# Altium PCB ETS_v8-nordic-split.PcbDoc
Units mil, origin at the board's own origin, x right, y up, seen from the top; angles counter-clockwise.
Board outline 1165.35 x 326.77 mil, 2 copper layers (Top Layer, Bottom Layer), stack 62.8 mil thick; 35 components, 30 nets, 135 pads, 13 vias.
Unrouted connection lines stored in the file: 27.
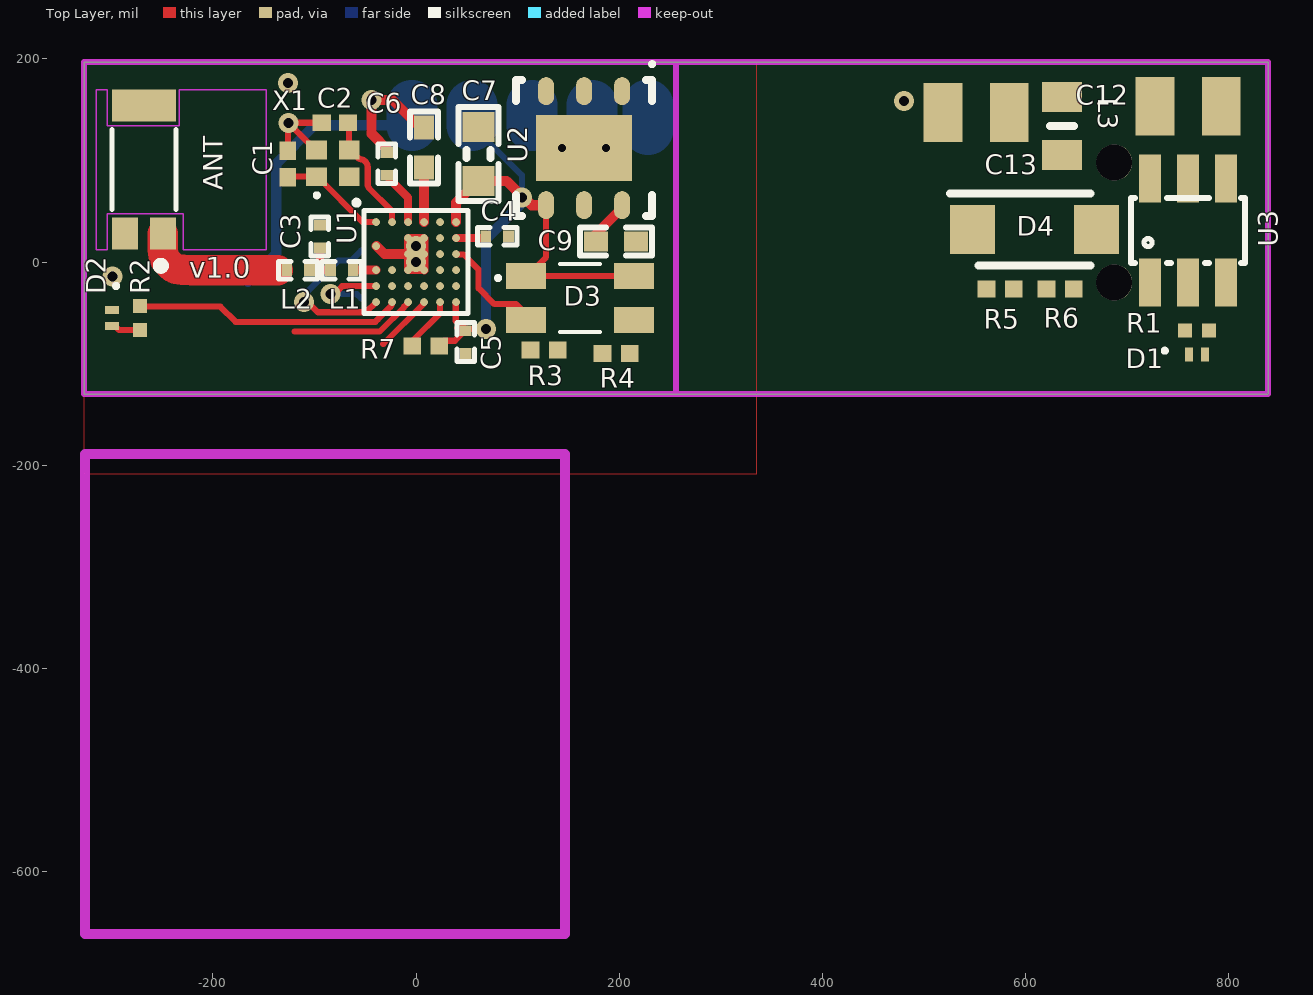
[diagram p0: Top Layer view]
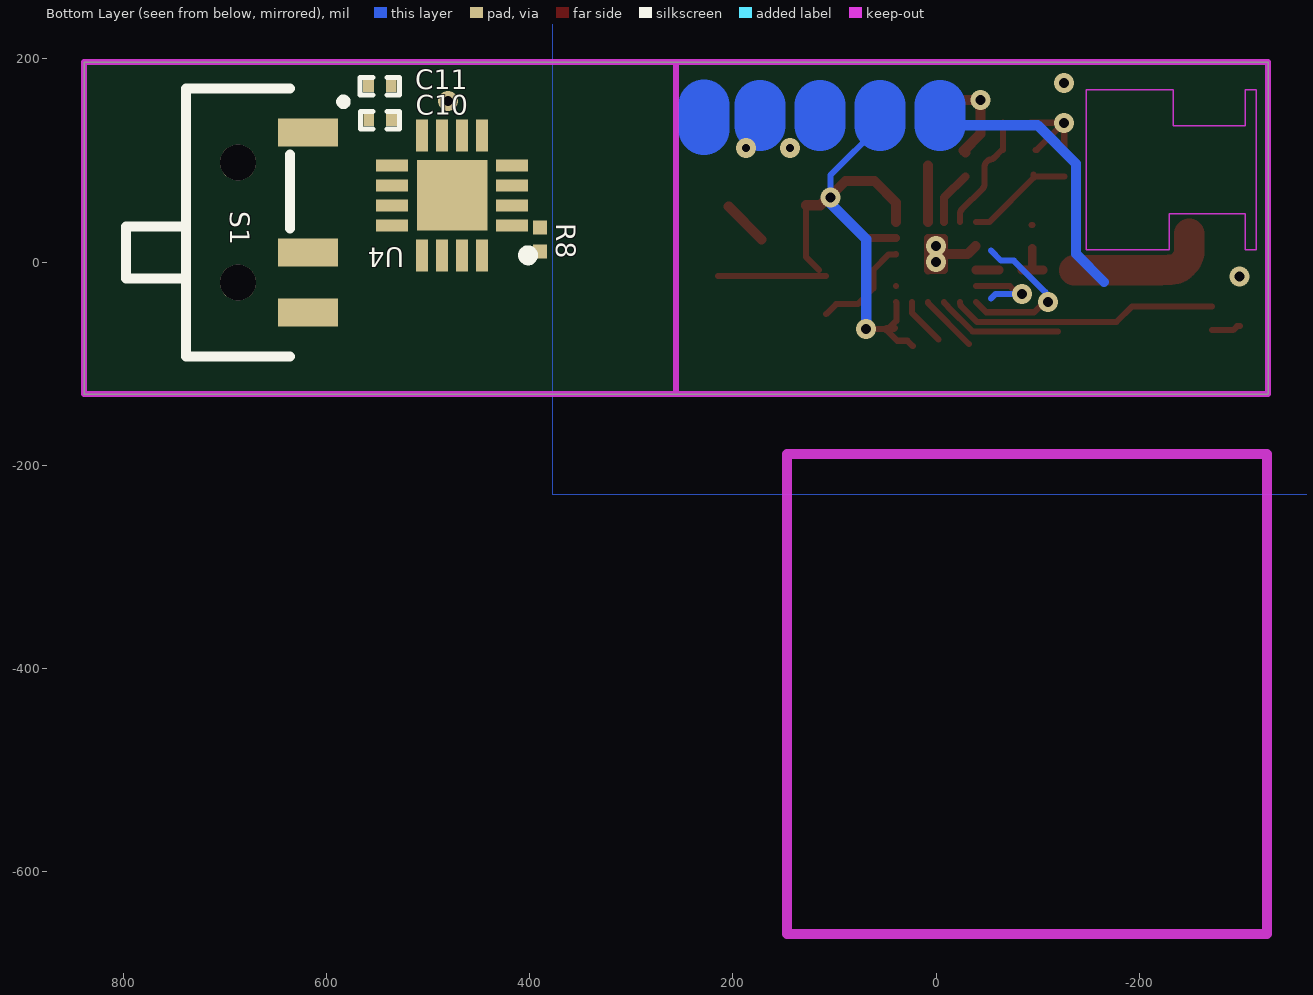
[diagram p1: Bottom Layer view, seen from below]

## Layer stack, top to bottom
Top Solder: solder mask 0.4, Solder Resist, Dk 3.5
Top Layer: signal copper 1.4
Dielectric1: core 60, FR-4, Dk 4.8
Bottom Layer: signal copper 1.4
Bottom Solder: solder mask 0.4, Solder Resist, Dk 3.5

## Board outline
-326.77,-129.92 838.58,-129.92 838.58,196.85 -326.77,196.85

## Design rules (kind name [scope] priority, off if disabled: settings)
Clearance Polygon_ANT [(InNamedPolygon('Top_Layer-GND')) or (InNamedPolygon('Bottom_Layer-GND')) vs InNet('RF')] p1: gap=5 ignorepadtopadclearanceinfootprint=FALSE except(0: Arc-Hole Track-Hole SMDPad-Hole THPad-Hole Via-Hole Fill-Hole Poly-Hole Region-Hole Text-Hole)
Clearance Polygon [(InNamedPolygon('Top_Layer-GND')) or (InNamedPolygon('Bottom_Layer-GND')) or (InNamedPolygon('Mid_Layer_1-GND')) or (InNamedPolygon('Mid_Layer_2-GND'))] p2: gap=8 ignorepadtopadclearanceinfootprint=FALSE except(0: Arc-Hole Track-Hole SMDPad-Hole THPad-Hole Via-Hole Fill-Hole Poly-Hole Region-Hole Text-Hole)
Clearance [All] p3: gap=5 ignorepadtopadclearanceinfootprint=FALSE except(3.5: Arc-Arc Arc-Track Track-Track)
ComponentClearance [All] p1 off: gap=10 collisioncheckmode=3 verticalgap=10 showdistances=FALSE
FabricationTestPointUsage TestPointUsage [All] p1: valid=0 allowmultiple=FALSE
FabricationTestpoint Testpoint [All] p1: side=3 testpointundercomponent=TRUE minsize=40 maxsize=100 preferedsize=60 minholesize=0 maxholesize=40 preferedholesize=32 testpointgrid=1 allowsidetop=TRUE allowsidebottom=TRUE usegrid=TRUE gridtolerance=0.01
Height [All] p1 off: minheight=0 maxheight=1000 prefheight=500
HoleSize [All] p1: absolutevalues=TRUE maxlimit=248.03 minlimit=7.87 maxpercent=80.000 minpercent=20.000
HoleToHoleClearance [All] p1 off: gap=3 allowstackedmicrovias=FALSE
MinimumAnnularRing [All] p1 off: minimumring=3
PolygonConnect PolygonConnect_1 [isVia and innet(gnd)] p1: connectstyle=Direct reliefconductorwidth=10 reliefentries=4 polygonreliefangle="90 Angle" airgapwidth=10
PolygonConnect [All] p2: connectstyle=Relief reliefconductorwidth=10 reliefentries=4 polygonreliefangle="90 Angle" airgapwidth=10
RoomDefinition ETS_v8-nordic-split [InComponentClass('ETS_v8-nordic-split')] p1: confinementstyle=ConfineIn formatcopy=TRUE lockcomponents=FALSE outline -413.39,-251.97 874.02,-251.97 874.02,256.85 -413.39,256.85
RoutingVias [All] p1: holewidth=16 width=32 viastyle="Through Hole" minholewidth=3.94 minwidth=9.84 maxholewidth=28 maxwidth=50
SilkToSolderMaskClearance SilkscreenOverComponentPads [IsPad] p1: minsilkscreentomaskgap=10 clearancetoexposedcopper=TRUE
SolderMaskExpansion [All] p1: expansion=3 istentingtop=FALSE
Width [All] p1: maxlimit=100 minlimit=5 preferedwidth=6 minimp=50.000000 maximp=50.000000 favimp=50.000000
23 further rules are at their usual default settings.

## Components (designator, comment, footprint, x,y, rotation, side; value= is the part's Value field where it differs from the comment)
ANT "W3008" *ANTENNA_W3008W3008(Primary) -267.72,91.05 r270 top
C1 "16pF" CAPC0603X33N -126.28,96.46 r270 top
C2 "16pF" CAPC0603X33N -80.02,137.18 r0 top
C3 "1.2pF" CAPC0603X03L_C -94.63,25.12 r270 top
C4 "100nF" CAPC0603X03L_C 79.87,25.25 r0 top
C5 "100nF" CAPC0603X03L_C 48.7,-78.74 r270 top
C6 "100pF" CAPC0603X03L_C -28.81,96.77 r270 top
C7 "4.7µF" CAPC1608X06L 61.6,106.3 r90 top
C8 "1.0µF" CAPC1005X04L 7.87,112.95 r270 top
C9 "1.0µF" CAPC1005X04L 196.85,20.2 r180 top
C10 "100nF" CAPC0603X03L_C 547.24,139.76 r0 bottom
C11 "100nF" CAPC0603X03L_C 547.52,173.23 r180 bottom
C12 "22uF" CAPC2012X145N 759.84,153.43 r0 top
C13 "22uF" CAPC2012X145N 551.18,147.18 r0 top
D1 "APG0603VGC-TT-5MAV" LED_APG0603SEC-E-TT 768.46,-91.17 r0 top
D2 "APG0603SURC-TT" LED_APG0603SEC-E-TT -299.21,-55.12 r270 top
D3 "GP2S60A" GP2S60B 161.42,-35.43 r0 top
D4 "SS34FA" SODFL3618X143N 608.55,32.14 r0 top
L1 "2.2nH" INDC0603X03L_C -73.13,-7.87 r180 top
L2 "3.3nH" INDC0603X03L_C -116.13,-7.88 r180 top
L3 "LQM18PH4R7MFRL" LQW18CA32NJ00D 635.96,133.86 r270 top
R1 "60R 1% 0201(0603)" RESC0201(0603)_L 768.46,-67.55 r0 top value="1.00 Ohm"
R2 "137R 1% 0201(0603)" RESC0201(0603)_L -271.65,-55.12 r270 top value="1.00 Ohm"
R3 "210R 1% 0201(0603)" RESC0603X26N 125.98,-86.61 r180 top
R4 "324R 1% 0201(0603)" RESC0603X26N 196.85,-89.96 r0 top
R5 "10kR" RESC0603X26N 574.8,-26.61 r180 top
R6 "4.7kR" RESC0603X26N 633.86,-26.61 r180 top
R7 "1kR" RESC0603X26N 9.57,-82.68 r0 top
R8 "120mR 1% 0201(0603)" RESC0201(0603)_L 389.76,22.27 r270 bottom value="1.00 Ohm"
S1 "SSSS810701" SSSS810701 618.25,9.36 r270 bottom
U1 "nRF52811-CAAA" BGA33C40P6X6_247X246X50 0,0 r0 top
U2 "LD39050PU33R" DFN6D_L 165.35,112.11 r270 top
U3 "" *SOT23-6 759.84,31 r0 top
U4 "DRV8847RTER" QFN50P300X300X80-17N-D 476.38,65.74 r0 bottom
X1 "ECS-320-10-48-CKY-TR" ECS240848CKYTR -81.99,97.23 r0 top

## Footprints (in the part's own frame and the unit in brackets; to place one, negate y for a bottom-side part, rotate by r counter-clockwise, add the part's x,y. Pads: shape width x height; smd on the part's side, far side on the other; paste and mask are expansions set on the pad)
*ANTENNA_W3008W3008(Primary) [mm]
  rect 0.8x0.65 smd: FEED(1.6,0.475) G1(1.6,-0.475)
  rect 0.8x1.6 smd: G2(-1.6,0)
  Keep-Out Layer region: -2,-1.2 -2,-0.925 -1.1,-0.925 -1.1,0.875 -2,0.875 -2,3.05 2,3.05 2,0.975 1.1,0.975 1.1,-0.925 2,-0.925 2,-1.2
  Keep-Out Layer region: -2,-1.2 2,-1.2 2,-0.925 1.1,-0.925 1.1,0.975 2,0.975 2,3.05 -2,3.05 -2,0.875 -1.1,0.875 -1.1,-0.925 -2,-0.925
  Keep-Out Layer region: -2,-1.2 -2,-0.925 -1.1,-0.925 -1.1,0.875 -2,0.875 -2,3.05 2,3.05 2,0.975 1.1,0.975 1.1,-0.925 2,-0.925 2,-1.2
  Keep-Out Layer region: -2,-1.2 2,-1.2 2,-0.925 1.1,-0.925 1.1,0.975 2,0.975 2,3.05 -2,3.05 -2,0.875 -1.1,0.875 -1.1,-0.925 -2,-0.925
  Keep-Out Layer region: -2,-1.2 -2,-0.925 -1.1,-0.925 -1.1,0.875 -2,0.875 -2,3.05 2,3.05 2,0.975 1.1,0.975 1.1,-0.925 2,-0.925 2,-1.2
  Keep-Out Layer region: -2,-1.2 2,-1.2 2,-0.925 1.1,-0.925 1.1,0.975 2,0.975 2,3.05 -2,3.05 -2,0.875 -1.1,0.875 -1.1,-0.925 -2,-0.925
  silkscreen extent -1,-0.8 2.5,0.8
*SOT23-6 [mm]
  rect 0.55x1.2 smd: 1(-0.95,-1.3) 2(0,-1.3) 3(0.95,-1.3) 4(0.95,1.3) 5(0,1.3) 6(-0.95,1.3)
  silkscreen extent -1.42,-0.81 1.42,0.81, body extent -1.45,-1.4 1.45,1.4, height 1.45
BGA33C40P6X6_247X246X50 [mm] "BGA, 33-Leads, Body 2.47x2.46mmx0.50mm, Pitch 0.40mm"
  round 0.194 smd mask+0.05: A1(-1,1) A2(-0.6,1) A3(-0.2,1) A4(0.2,1) A5(0.6,1) A6(1,1) B3(-0.2,0.6) B4(0.2,0.6) B5(0.6,0.6) B6(1,0.6) C1(-1,0.4) D3(-0.2,0.2) D4(0.2,0.2) D5(0.6,0.2) D6(1,0.2) E1(-1,-0.2) E2(-0.6,-0.2) E3(-0.2,-0.2) E4(0.2,-0.2) E5(0.6,-0.2) E6(1,-0.2) F1(-1,-0.6) F2(-0.6,-0.6) F3(-0.2,-0.6) F4(0.2,-0.6) F5(0.6,-0.6) F6(1,-0.6) G1(-1,-1) G2(-0.6,-1) G3(-0.2,-1) G4(0.2,-1) G5(0.6,-1) G6(1,-1)
  silkscreen extent -1.55,-1.29 1.3,1.55, body extent -1.23,-1.23 1.23,1.23, height 0.5
CAPC0603X03L_C [mm] "Chip Capacitor, 2-Leads, Body 0.6x0.3mm, IPC High Density"
  rect 0.27x0.3 smd: 1(-0.285,0) 2(0.285,0)
  silkscreen extent -0.49,-0.22 0.49,0.22, body extent -0.3,-0.15 0.31,0.15, height 0.3
CAPC0603X33N [mm]
  rect 0.46x0.42 smd: 1(-0.33,0) 2(0.33,0)
  body extent -0.3,-0.15 0.3,0.15, height 0.33
CAPC1005X04L [mm] "Chip Capacitor, 2-Leads, Body 1.0x0.5mm, IPC High Density"
  rect 0.6x0.5 smd: 1(-0.5,0) 2(0.5,0)
  silkscreen extent -0.9,-0.35 0.9,0.35, body extent -0.51,-0.25 0.51,0.25, height 0.5
CAPC1608X06L [mm] "Chip Capacitor, 2-Leads, Body 1.6x0.8mm, IPC High Density"
  rect 0.75x0.8 smd: 1(-0.675,0) 2(0.675,0)
  silkscreen extent -1.17,-0.5 1.17,0.5, body extent -0.8,-0.43 0.8,0.43, height 0.8
CAPC2012X145N [mm]
  rect 0.97x1.47 smd: 1(-0.83,0) 2(0.83,0)
  body extent -1,-0.63 1,0.63, height 1.45
DFN6D_L [mm] "SON, 6-Leads, Body 3x3mm, Pitch 0.95mm, Thermal Pad 2.4x1.65mm, IPC High Density"
  oval 0.7x0.4 smd: 1(-1.425,0.95) 2(-1.425,0) 3(-1.425,-0.95) 4(1.425,-0.95) 5(1.425,0) 6(1.425,0.95)
  rect 1.65x2.4 smd: 7(0,0)
  silkscreen extent -2.15,-1.7 1.7,1.75, body extent -1.55,-1.55 1.55,1.55, height 0.95
ECS240848CKYTR [mm]
  rect 0.52x0.47 smd: 1(-0.41,-0.335) 2(0.41,-0.335) 3(0.41,0.335) 4(-0.41,0.335)
  silkscreen extent -0.45,-0.85 -0.35,-0.75
GP2S60B [mm]
  rect 1x0.65 smd: 1(-1.35,0.55) 2(-1.35,-0.55) 3(1.35,-0.55) 4(1.35,0.55)
  silkscreen extent -2.1,-0.85 0.5,0.85, body extent -1.35,-0.85 1.35,0.85, height 1.35
INDC0603X03L_C [mm] "Chip Inductor, 2-Leads, Body 0.6x0.3mm, IPC High Density"
  rect 0.27x0.3 smd: 1(-0.285,0) 2(0.285,0)
  silkscreen extent -0.49,-0.22 0.49,0.22, body extent -0.31,-0.16 0.31,0.16, height 0.26
LED_APG0603SEC-E-TT [mm]
  rect 0.2x0.35 smd paste-1: A(0.2,0) C(-0.2,0)
  silkscreen extent -0.85,0.05 -0.75,0.15
LQW18CA32NJ00D [mm]
  rect 0.75x1 smd: 1(-0.725,0) 2(0.725,0)
  silkscreen extent 0,-0.3 0,0.3
QFN50P300X300X80-17N-D [mm]
  rect 0.8x0.3 smd: 1(-1.5,0.75) 2(-1.5,0.25) 3(-1.5,-0.25) 4(-1.5,-0.75) 9(1.5,-0.75) 10(1.5,-0.25) 11(1.5,0.25) 12(1.5,0.75)
  rect 0.3x0.8 smd: 5(-0.75,-1.5) 6(-0.25,-1.5) 7(0.25,-1.5) 8(0.75,-1.5) 13(0.75,1.5) 14(0.25,1.5) 15(-0.25,1.5) 16(-0.75,1.5)
  rect 1.76x1.76 smd: 17(0,0)
  silkscreen extent -2.02,1.38 -1.77,1.62, body extent -1.55,-1.55 1.55,1.55, height 0.8
RESC0201(0603)_L [mm] "Chip Resistor, Body 0.6x0.3mm, IPC High Density"
  rect 0.35x0.35 smd: 1(-0.3,0) 2(0.3,0)
  body extent -0.31,-0.16 0.31,0.16, height 0.3
RESC0603X26N [mm]
  rect 0.44x0.42 smd: 1(-0.34,0) 2(0.34,0)
  body extent -0.3,-0.15 0.3,0.15, height 0.26
SODFL3618X143N [mm]
  rect 1.12x1.22 smd: 1(-1.55,0) 2(1.55,0)
  silkscreen extent -2.11,-0.9 1.4,0.9, body extent -1.8,-0.9 1.8,0.9, height 1.43
SSSS810701 [mm]
  rect 0.7x1.5 smd: 1(-3,0) 2(0,0) 3(1.5,0)
  round 0.9 hole 0.9 unplated: 4(-2.25,-1.75) 5(0.75,-1.75)
  silkscreen extent -4.1,-4.55 2.6,0.94

## Part data
ANT: "2.4GHz Bluetooth Chip RF Antenna 2.4GHz ~ 2.483GHz 1.7dBi Solder Surface Mount", Package=None, Availability=Unavailable, MF="PulseLarsen Antennas", MP=W3008, Price=None, SnapEDA_Link=https://www.snapeda.com/parts/W3008/PulseLarsen%20Antennas/view-part/233875/?ref=snap
C1 C2: library part GRM0335C1H160JA01D, "Capacitor", Manufacturer_Name="Murata Electronics", Datasheet Link=http://www.murata.com/~/media/webrenewal/support/library/catalog/products/capacitor/mlcc/c02e.pdf, Height=0.33mm, Manufacturer_Part_Number=GRM0335C1H160JA01D
C3: library part C0201-1.2p, "Capacitor, NP0, ±5%", Footprint Doc=0201, LatestRevisionDate=2014-11-13, Part Number=C0201-1.2p, Pin Count=2, Published=2014-11-13, Publisher="Nordic Semiconductor"
C4 C5: library part C0201-100n, "Capacitor, X5R, ±10%", Footprint Doc=0201, LatestRevisionDate=2017-11-09, Part Number=C0201-100n, Pin Count=2, Published=2014-11-13, Publisher="Nordic Semiconductor"
C6: library part C0201-100p, "Capacitor, NP0, ±2%", Footprint Doc=0201, LatestRevisionDate=2017-11-09, Part Number=C0201-100p, Pin Count=2, Published=2014-11-13, Publisher="Nordic Semiconductor"
C7: library part C0603-4µ7, "Capacitor, X5R, ±10%", Footprint Doc=0603, LatestRevisionDate=2009-11-23, Part Number=C0603-4µ7, Pin Count=2, Published=2009-05-08, Publisher="Nordic Semiconductor"
C8 C9: library part C0402-1µ0, "Capacitor, X5R, ±5%", Footprint Doc=0402, LatestRevisionDate=2016-08-22, Part Number=C0402-1µ0, Pin Count=2, Published=2009-05-08, Publisher="Nordic Semiconductor"
C10: "Capacitor, X5R, ±10%", Part Number=C0201-100n, Footprint Doc=0201, LatestRevisionDate=2017-11-09, Pin Count=2, Published=2014-11-13, Publisher="Nordic Semiconductor"
C11: library part GRM188R61C106KAALD, "Capacitor", Manufacturer_Name="Murata Electronics", Datasheet Link=https://psearch.en.murata.com/capacitor/product/GRM188R61C106KAAL%23.html, Height=0.9mm, Manufacturer_Part_Number=GRM188R61C106KAALD
C12 C13: library part GRM21BR61E226ME44K, "Capacitor", Manufacturer_Name="Murata Electronics", Datasheet Link=http://www.murata.com/~/media/webrenewal/support/library/catalog/products/capacitor/mlcc/c02e.pdf, Height=1.45mm, Manufacturer_Part_Number=GRM21BR61E226ME44K
D1: library part APG0603SEC-E-TT, "Green 527nm LED Indication - Discrete 3V 2-SMD, 0201", Package="0201 Kingbright", Availability=Unavailable, MF=Kingbright, MP=APG0603SEC-E-TT, Price=None, SnapEDA_Link=https://www.snapeda.com/parts/APG0603SEC-E-TT/Kingbright/view-part/2754377/?ref=snap
D2: library part APG0603SEC-E-TT, "Red 631nm LED Indication - Discrete 1.92V 2-SMD, 0201", Package="0201 Kingbright", Availability=Unavailable, MF=Kingbright, MP=APG0603SEC-E-TT, Price=None, SnapEDA_Link=https://www.snapeda.com/parts/APG0603SEC-E-TT/Kingbright/view-part/2754377/?ref=snap
D3: library part GP2S60B, "LED", Manufacturer_Name="Sharp Microelectronics", Mouser2 Part Number=852-GP2S60B, Datasheet Link=https://componentsearchengine.com/Datasheets/1/GP2S60B.pdf, Height=1.25mm, Manufacturer_Part_Number=GP2S60B, Mouser2 Price/Stock=https://www.mouser.com/Search/Refine.aspx?Keyword=852-GP2S60B
D4: "Schottky Diode", Manufacturer_Name="ON Semiconductor", Mouser2 Part Number=512-SS34FA, Datasheet Link=https://componentsearchengine.com/Datasheets/1/SS34FA.pdf, Height=1.43mm, Manufacturer_Part_Number=SS34FA, Mouser2 Price/Stock=https://www.mouser.com/Search/Refine.aspx?Keyword=512-SS34FA
L1: library part L0201-2n2, "High frequency chip inductor ±5%", Footprint Doc=0201, LatestRevisionDate=2013-04-10, Part Number=L0201-2n2, Pin Count=2, Published=2013-04-10, Publisher="Nordic Semiconductor"
L2: library part L0201-3n3, "High frequency chip inductor ±5%", Footprint Doc=0201, LatestRevisionDate=2013-04-10, Part Number=L0201-3n3, Pin Count=2, Published=2013-04-10, Publisher="Nordic Semiconductor"
L3: "Inductor", Manufacturer_Name="Murata Electronics", Mouser2 Part Number=81-LQM18PH4R7MFRL, Datasheet Link=https://psearch.en.murata.com/inductor/product/LQM18PH4R7MFR%23.html, Height=0.95mm, Manufacturer_Part_Number=LQM18PH4R7MFRL, Mouser2 Price/Stock=https://www.mouser.com/Search/Refine.aspx?Keyword=81-LQM18PH4R7MFRL
R1 R2 R8: library part CMP-1010-00171-1, "1R 0.05W 1% 0201 (0603 Metric)  SMD", Case-EIA=0201, Case-Metric=0603, Power="0.05 W", Tolerance="1 %", Technology=SMT
R3: library part RC0201FR-0710KL, "Resistor", Manufacturer_Name="YAGEO (PHYCOMP)", Mouser2 Part Number=603-RC0201FR-0710KL, Datasheet Link=https://componentsearchengine.com/Datasheets/1/RC0201FR-0710KL.pdf, Height=0.26mm, Manufacturer_Part_Number=RC0201FR-0710KL, Mouser2 Price/Stock=https://www.mouser.com/Search/Refine.aspx?Keyword=603-RC0201FR-0710KL
R4: library part RC0201FR-07390RL, "Resistor", Manufacturer_Name="YAGEO (PHYCOMP)", Datasheet Link=http://www.yageo.com/documents/recent/PYu-RC0201_51_RoHS_L_8.pdf, Height=0.26mm, Manufacturer_Part_Number=RC0201FR-07390RL
R5: library part RC0201FR-07100KL, "Resistor", Manufacturer_Name="YAGEO (PHYCOMP)", Datasheet Link=http://www.yageo.com/documents/recent/PYu-RC0201_51_RoHS_L_8.pdf, Height=0.26mm, Manufacturer_Part_Number=RC0201FR-07100KL
R6: library part CRCW02014K70FKED, "Resistor", Manufacturer_Name=Vishay, Datasheet Link=http://www.vishay.com/docs/20035/dcrcwe3.pdf, Height=0.28mm, Manufacturer_Part_Number=CRCW02014K70FKED
R7: library part CRCW02011K00FNED, "Resistor", Manufacturer_Name=Vishay, Datasheet Link=http://www.vishay.com/docs/20035/dcrcwe3.pdf, Height=0.28mm, Manufacturer_Part_Number=CRCW02011K00FNED
S1: "Switch", Manufacturer_Name=ALPS, Mouser2 Part Number=688-SSSS810701, Datasheet Link=https://componentsearchengine.com/Datasheets/1/SSSS810701.pdf, Manufacturer_Part_Number=SSSS810701, Mouser2 Price/Stock=https://www.mouser.com/Search/Refine.aspx?Keyword=688-SSSS810701
U1: library part nRF52811-CAAAA0, "Multi-protocol Bluetooth Low Energy, IEEE 802.15.4, ANT and 2.4GHz proprietary system-on-chip", Manufacturer="Nordic Semiconductor", Footprint Doc=WLCSP-33, LatestRevisionDate=2019-01-30, Manufacturer Part Number=nRF52811-CAAAA0, Part Number=nRF52811-CAAAA0, Pin Count=33, Published=2019-01-30, Publisher="Nordic Semiconductor"
U2: library part CMP-0244-00288-1, "500 mA Low Quiescent Current Low Noise Voltage Regulator, 3.3V, 6-Pin VDFDPN, Tape and Reel", ComponentLink1Description="Manufacturer URL", ComponentLink1URL=http://www.st.com, ComponentLink2Description=Datasheet, ComponentLink2URL=http://www.st.com/internet/com/TECHNICAL_RESOURCES/TECHNICAL_LITERATURE/DATASHEET/CD00227527.pdf, DatasheetVersion=1/03/2009, PackageDescription="6-Pin Plastic, Dual LLP, 3 x 3 mm Body, 0.95 mm Pitch, Exposed Pad", PackageReference=DFN6D, PackageVersion=2008
U3: library part MT3608, "High Efficiency 1.2MHz / 2A Step Up Converter", SnapEDA_Link=https://www.snapeda.com/parts/MT3608/Aerosemi%20Technology%20Co.%2C%20Ltd/view-part/3218014/?ref=snap
U4: "Integrated Circuit", Manufacturer_Name="Texas Instruments", Mouser2 Part Number=595-DRV8847RTER, Datasheet Link=http://www.ti.com/lit/gpn/DRV8847, Height=0.8mm, Manufacturer_Part_Number=DRV8847RTER, Mouser2 Price/Stock=https://www.mouser.com/Search/Refine.aspx?Keyword=595-DRV8847RTER
X1: "Crystal or Oscillator", Manufacturer_Name=ECS, Datasheet Link=https://www.ecsxtal.com/store/pdf/ECX-1048.pdf, Height=0mm, Manufacturer_Part_Number=ECS-320-10-48-CKY-TR

## Free pads (board coordinates)
  round 19.68 on Mech16: 1(0,15.75) 2(0,0)

## Via types
v1: diameter 19.68, hole 9.84, Top Layer to Bottom Layer, tented both sides, 11 vias
v2: diameter 19.68, hole 7.87, Top Layer to Bottom Layer, 2 vias

## Nets (pads, with @x,y where several pads share a name; then routed paths per layer and width w, separated by ;. In a path a pad name is that pad's centre, name@x,y a point inside that pad or via, vN(x,y) a via of type N, cw(c..) or ccw(c..) an arc to the next point about the centre after c; other vN are vias at no path point)
DEC1: C4.1 U1.B6 | length 29.3
  Top Layer w8: U1.B6 C4.1@68.65,23.62
DEC2: C6.2 U1.A3 | length 53.7
  Top Layer w8: C6.2@-28.81,84.37 -7.87,63.43 U1.A3
DEC4: C8.2 U1.A4 | length 55.4
  Top Layer w10: U1.A4 C8.2@7.87,94.81
GND: ANT.G1 ANT.G2 C1.1 C2.1 C3.1 C4.2 C5.2 C6.1 C7.2 C8.1 C9.1 C10.2 C11.1 C12.2 C13.2 D1.C D2.C R3.1 R4.1 R6.1 R8.2 U1.B3 U1.B4 U1.C1 U1.D3 U1.D4 U1.E3 U1.E4 U2.2 U2.7 U3.2 U4.7 U4.8 U4.11 U4.12 U4.17 X1.4 | length 363.6
  Top Layer w6: C1.1 -126.18,109.55 v1@-126.18,137.08 ; X1.4 -99.11,110.42 v1(-125.77,137.08) v1@-126.18,137.08 ; C3.1 C3.1@-94.04,36.34 ; C2.1 -126.08,137.18 v1@-126.18,137.08 ; U1.C1 U1.C1@-38.93,15.75
  Top Layer w8: U1.B3 U1.B4 ; U1.D3@-7.75,7.62 U1.D3@-7.75,7.87 ; U1.B3@-7.75,23.37 U1.D3@-7.75,7.87 ; U1.E4 U1.E3 U1.D3 U1.D3@-7.75,7.87 ; U1.D4 U1.D3@-7.75,7.87 ; U1.E4@8,-8.13 8,7.62 U1.B4@8,23.37
  Top Layer w10: U1.C1@-38.93,15.75 -31.05,7.87 U1.D3 ; C6.1 -27.18,109.67 -43.78,126.27 v1(-43.78,159.45) -23.21,159.45 2.38,133.86 2.97,134.45 C8.1@3.98,133.44
  other v1: -298.8,-14.37 0,0 0,15.75 -126.02,176.48
HV: C10.1 C11.2 C13.1 D4.1 R5.2 U4.10
  other v1: 480.32,158.37
NetC3_2: C3.2 L1.2 L2.1 | length 42.8
  Top Layer w8: -95.13,-7.88 -94.63,-7.38 C3.2
  Top Layer w9: L2.1@-105.38,-7.88 L2.1 -95.13,-7.88 L1.2@-84.6,-7.88
NetD1_A: D1.A R1.2
NetD2_A: D2.A R2.2 | length 29.2
  Top Layer w6: D2.A -296.26,-62.99 -292.32,-66.93 R2.2
NetD3_3: D3.3 R4.2
NetD4_2: D4.2 L3.2 U3.1
NetL1_1: L1.1 U1.E1 | length 22.5
  Top Layer w9: L1.1 U1.E1
NetR5_1: R5.1 R6.2 U3.3
NetR8_1: R8.1 U4.1
P0.03/AIN1: D3.2 R3.2 U1.D6 | length 135.6
  Top Layer w6: U1.D6@39.81,7.87 U1.D6 39.68,7.56 46.66,7.56 61.6,-7.38 61.6,-25.92 77.07,-41.39 98.47,-41.39 D3.2@108.27,-51.18
  Bottom Layer w6: 114.17,134.45 121.93,126.69
  Bottom Layer w50: 114.17,134.45 114.17,154.45
P0.05/AIN3: U1.E6
P0.08: U1.F6 | length 0
P0.12: R7.1 U1.G5 U4.6 | length 47.8
  Top Layer w6: R7.1@-2.52,-76.29 23.62,-50.15 U1.G5
P0.15: U1.G4 U4.14 | length 57.9
  Top Layer w6: -32.35,-80.63 7.87,-40.41 U1.G4
P0.16: U1.G3 U4.13 | length 124.5
  Top Layer w6: -119.76,-68.34 -35.88,-68.34 -11.8,-44.27 -11.8,-43.74 -7.87,-39.81 U1.G3
P0.20: R2.1 U1.G2 | length 263.8
  Top Layer w6: R2.1@-271.65,-43.74 -192.68,-43.74 -177.59,-58.84 -40.12,-58.84 -37.67,-56.39 -25.39,-44.11 ccw(c-29.62,-39.86) -23.62,-39.86 U1.G2
PAD_A: U4.16
PAD_B: U4.2
RF: ANT.FEED L2.2 | length 140.1
  Top Layer w30: ANT.FEED@-249.33,27.75 -249.33,12.31 ccw(c-229.33,12.31) -229.76,-7.68 -220.61,-7.88 -136.13,-7.88
SWDCLK: U1.G1 | length 160.7
  Top Layer w6: v1(-110.24,-39.37) -106.53,-39.37 -96.56,-49.34 -49.34,-49.34 U1.G1
  Bottom Layer w6: v1(-110.24,-39.37) -107.62,-36.75 -107.62,-29.53 -76.56,1.53 -63.92,1.53 -54.12,11.32 -54.12,11.52
SWDIO: U1.F1 | length 80.2
  Top Layer w6: v1(-84.35,-31.5) -80.65,-31.5 -72.77,-23.62 U1.F1
  Bottom Layer w6: v1(-84.35,-31.5) -58.35,-31.5 -54.12,-35.72
VDD_NRF: C5.1 C7.1 D3.1 D3.4 R1.1 R7.2 U1.A6 U1.G6 U2.4 U4.15 | length 691.2
  Top Layer w6: R7.2 28.23,-77.41 38.22,-77.41 48.11,-67.52 C5.1 C5.1@47.01,-65.82 ; U1.G6 39.06,-39.68 39.06,-57.88 C5.1@47.01,-65.82 ; 40.45,-64.84 41.43,-65.82 C5.1@47.01,-65.82 ; C5.1@48.7,-64.84 C5.1@49.68,-65.82 ; C7.1@60.62,79.72 C7.1 ; v1(68.97,-65.82) C5.1@49.68,-65.82 ; v1@100.9,67.96 104.08,64.77 v1(104.08,63.43) v1@106.5,63.43 ; D3.1 D3.4 ; D3.1@115.16,-7.88 127.95,4.92 127.95,51.83 U2.4 ; C5.1@47.01,-65.82 C5.1@49.68,-65.82
  Top Layer w10: U1.A6 39.37,58.48 C7.1@60.62,79.72 ; C7.1 83.25,79.72 89.13,79.72 v1@100.9,67.96 ; v1@106.5,63.43 113.92,56.01 U2.4
  Bottom Layer w6: 55.12,134.45 104.08,85.48 v1(104.08,63.43) ; 222.01,124.17 228.35,130.51 232.28,134.45
  Bottom Layer w10: v1@68.65,-65.82 68.65,22.5 104.08,57.93 v1(104.08,63.43)
  Bottom Layer w50: 55.12,134.45 55.12,154.45 ; 228.35,130.51 228.35,154.74
VIN_BAT: C9.2 C12.1 L3.1 S1.2 U2.6 U3.5 | length 45.8
  Top Layer w10: C9.2@171.75,22.27 U2.6@204.12,54.64
VIN_EN: S1.1 U2.1 U3.4
XC1: C1.2 U1.A1 X1.1 | length 106
  Top Layer w6: C1.2@-126.28,84.24 -126.08,84.04 X1.1 ; X1.1@-96.05,85.93 cw(c-100.3,81.69) -95.84,85.7 -95.84,82.74 -52.47,39.37 U1.A1
XC2: C2.2 U1.A2 X1.3 | length 116.6
  Top Layer w6: C2.2@-65.75,137.18 -65.85,137.08 X1.3 -64.86,110.42 -57.25,102.81 ccw(c-53.01,107.05) -54.12,101.15 cw(c-55.61,93.29) -47.61,93.29 -47.61,76.59 ccw(c-41.61,76.59) -45.85,72.35 -25.4,51.9 cw(c-29.62,47.64) -23.62,47.64 U1.A2
pads on no net: S1.3 S1.4 S1.5 U1.A5 U1.B5 U1.D5 U1.E2 U1.E5 U1.F2 U1.F3 U1.F4 U1.F5 U2.3 U2.5 U3.6 U4.3 U4.4 U4.5 U4.9 X1.2
copper on no net: | length 315.3
  Bottom Layer w10: -165.34,-19.53 -137.64,8.17 -137.64,96.92 -99.96,134.6 -5.91,134.6
  Bottom Layer w50: -3.94,134.45 -3.94,154.45 ; 173.23,134.45 173.23,154.45
  other v2: 143.7,112.11 187.01,112.11

## Polygon pours and split planes (outlines as drawn)
GND on Bottom Layer "Bottom_Layer-GND" (solid, remove dead copper, shelved, pour order 8): -385.83,-228.35 -385.83,236.25 377.95,236.25 377.95,-228.35
GND on Bottom Layer "NONET_L02_P010" (solid, shelved, pour order 10): 240.16,129.92
GND on Bottom Layer "NONET_L02_P009" (solid, shelved, pour order 9): 267.72,165.35
GND on Top Layer "NONET_L01_P011" (solid, remove dead copper, shelved, pour order 11): -326.77,196.85 334.65,196.85 334.65,-208.66 -326.77,-208.66
no net on Mechanical 1 "NONET_L-01_P-001" (solid): 2.95,-303.15
no net on Mechanical 1 "NONET_L-01_P-001" (solid): -382.87,-291.34

## Keep-outs
Keep-Out Layer:
  lines w6: 255.91,-129.92 838.58,-129.92 838.58,196.85 255.91,196.85 ; 255.91,-129.92 255.91,196.85 ; 255.91,-129.92 -326.77,-129.92 -326.77,196.85 255.91,196.85
  lines w10: -325.79,-661.42 146.65,-661.42 146.65,-188.98 -325.79,-188.98 -325.79,-661.42

## Other copper
Top Layer:
  pour cut-out: -37.13,39.25 -37.13,-5.75 -22.13,-5.75 -22.13,39.25

## Silkscreen, mask and mechanical layers (free items; w line width, h text height)
Top Overlay:
  text "v1.0" at -223.35,-15.66 h20
Mechanical 1:
  lines w6: 255.91,-129.92 838.58,-129.92 838.58,196.85 255.91,196.85 ; 255.91,-129.92 255.91,196.85 ; 255.91,-129.92 -326.77,-129.92 -326.77,196.85 255.91,196.85

## Dimensions
-326.77,196.85 to 838.58,196.85 on Top Overlay
-326.77,196.85 to -326.77,-129.92 on Top Overlay
334.65,196.85 to 334.65,-208.66 on Mechanical 3
-326.77,-208.66 to 334.65,-208.66 on Mechanical 3